# Altium PCB OutputPowerModule.PcbDoc
Units mm, origin at the board's own origin, x right, y up, seen from the top; angles counter-clockwise.
Board outline 53.88 x 57.91 mm, 2 copper layers (Top Layer, Bottom Layer); 62 components, 46 nets, 211 pads, 37 vias.
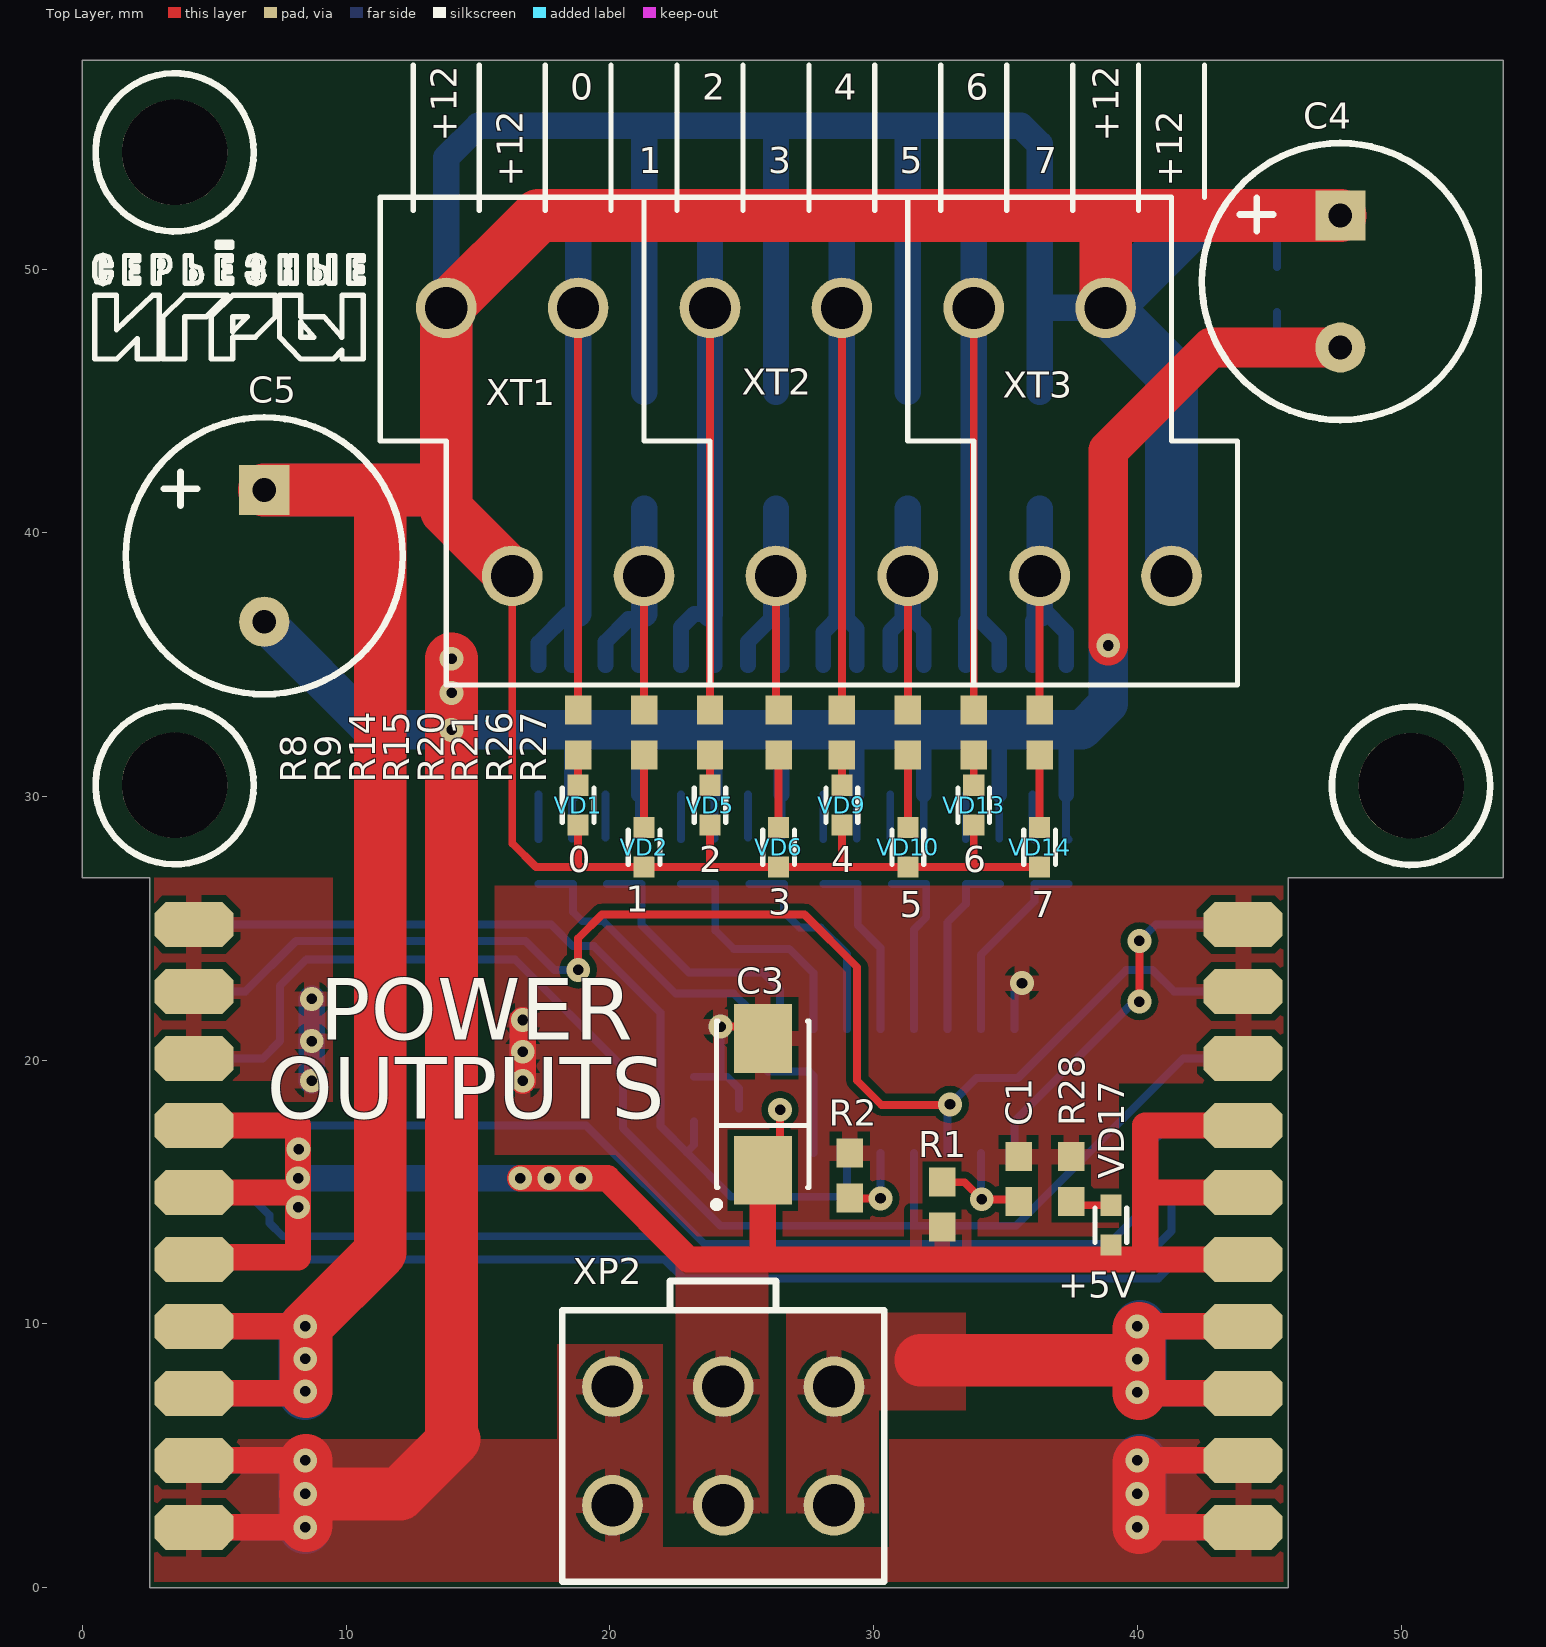
[diagram p0: Top Layer view]
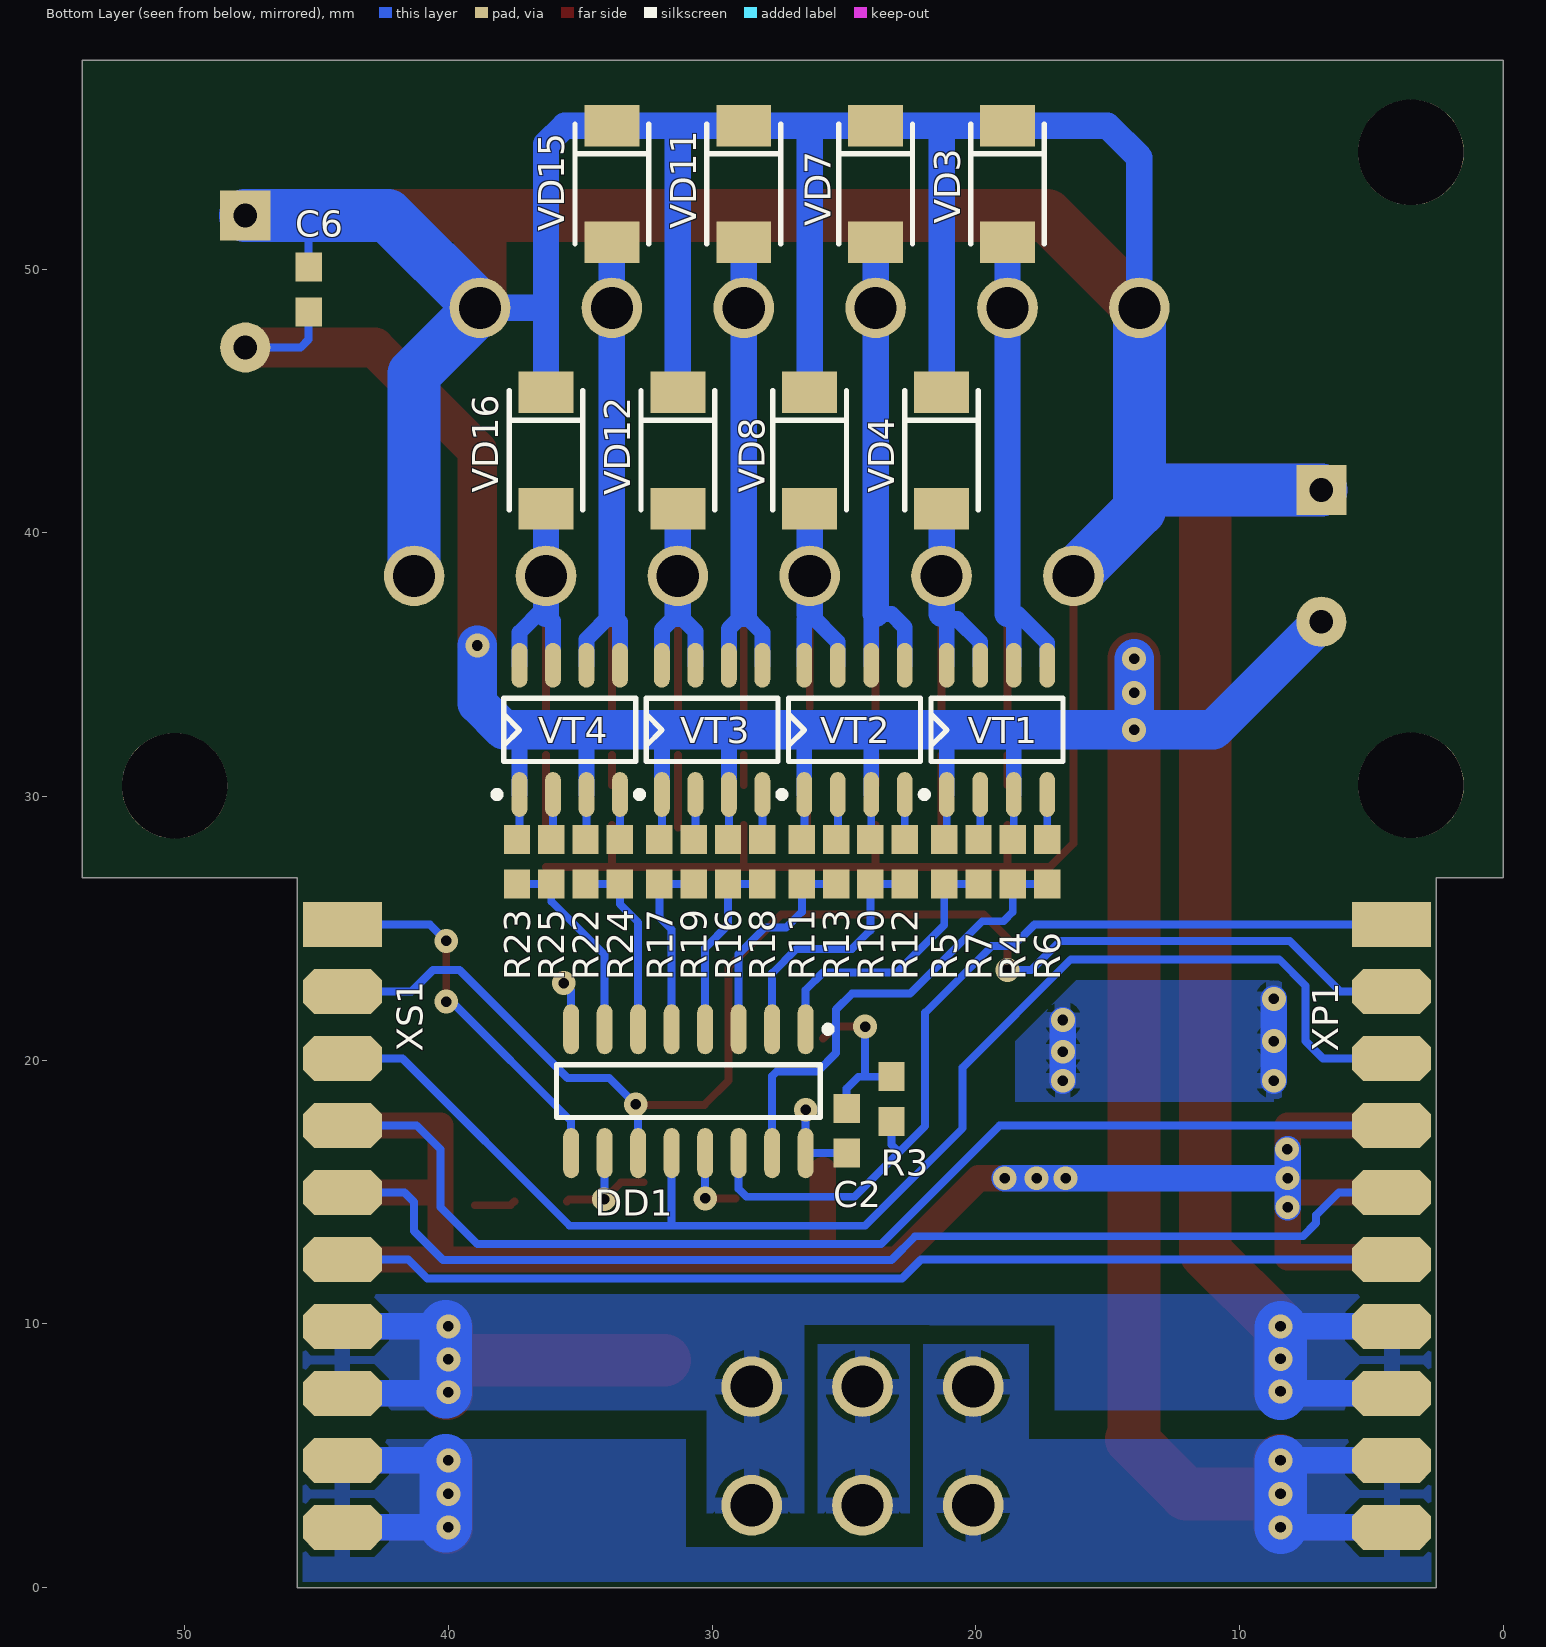
[diagram p1: Bottom Layer view, seen from below]
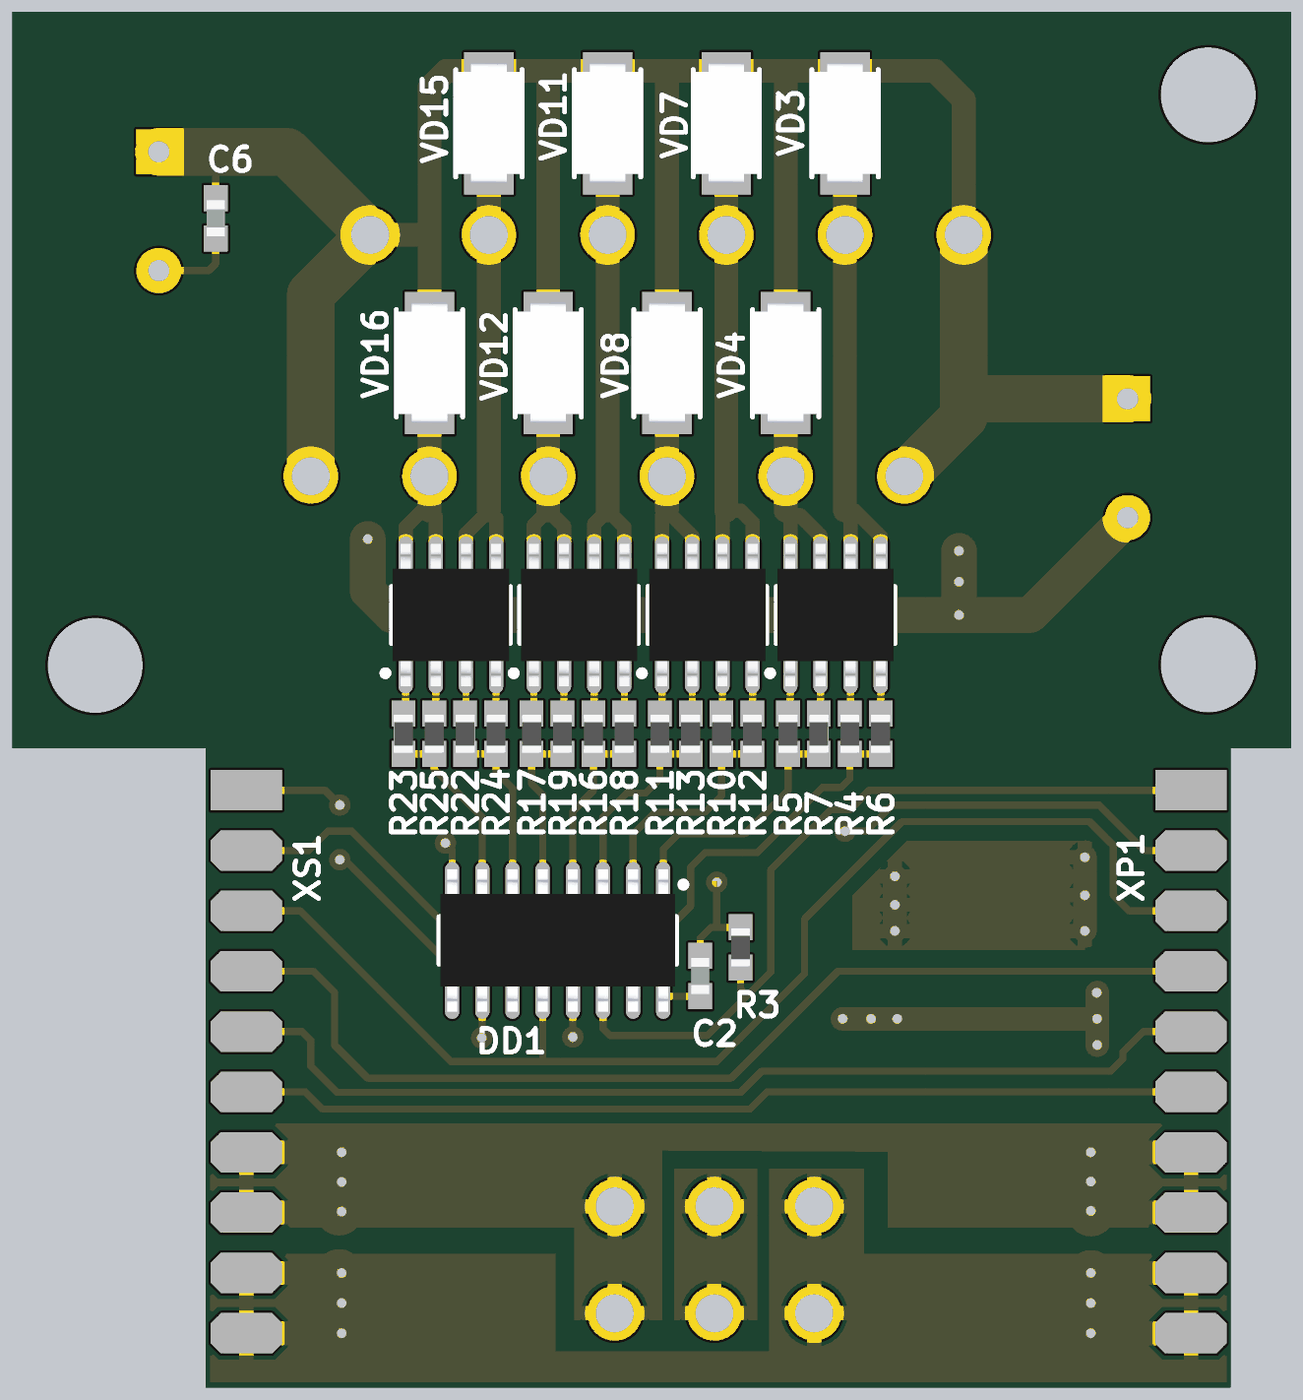
[diagram p2: 3D render of the assembled board from below, using the file's embedded part models]

## Layer stack, top to bottom
Top Layer: signal copper 0.0356
Dielectric: dielectric 0.32, FR-4, Dk 4.8
Bottom Layer: signal copper 0.0356

## Board outline
0,26.925 0,57.913 53.88,57.913 53.88,26.925 45.73,26.925 45.73,0.001 2.55,0.001 2.55,26.925

## Design rules (kind name [scope] priority, off if disabled: settings)
Clearance [All] p1: gap=0.254
HoleSize [All] p1: absolutevalues=TRUE maxlimit=5.54 minlimit=0.025 maxpercent=80.000 minpercent=20.000
PolygonConnect [All] p1: connectstyle=Relief reliefconductorwidth=0.6 reliefentries=4 polygonreliefangle="90 Angle"
RoutingVias [All] p1: holewidth=0.4 width=0.9 viastyle="Through Hole" minholewidth=0.3 minwidth=0.6 maxholewidth=7 maxwidth=7
SilkscreenOverComponentPads [All] p1: minsilkscreentomaskgap=0.254
SolderMaskExpansion [All] p1: expansion=0.102
Width [All] p1: maxlimit=2.54 minlimit=0.254 preferedwidth=0.254
26 further rules are at their usual default settings.

## Components (designator, comment, footprint, x,y, rotation, side; value= is the part's Value field where it differs from the comment)
C1 "0.1uF" C-1608[0603] 35.5,15.5 r270 top
C2 "0.1uF" C-1608[0603] 24.9,17.325 r90 bottom
C3 "47uF" C-CASE 25.8,18.325 r90 top
C4 "1000uF x 25V" D10-5MM 47.7,49.525 r0 top
C5 "1000uF x 25V" D10-5MM 6.9,39.125 r0 top
C6 "0.1uF" C-1608[0603] 45.3,49.225 r270 bottom
DD1 "SN74HC595D" SO-G16 30.9,18.825 r270 bottom
R1 "10K" R-1608[0603] 32.6,14.525 r270 top
R2 "10K" R-1608[0603] 29.1,15.625 r90 top
R3 "10K" R-1608[0603] 23.2,18.525 r90 bottom
R4 "10K" R-1608[0603] 18.6,27.525 r90 bottom
R5 "10K" R-1608[0603] 21.2,27.525 r90 bottom
R6 "510" R-1608[0603] 17.3,27.525 r270 bottom
R7 "510" R-1608[0603] 19.9,27.525 r270 bottom
R8 "2.7K" R-1608[0603] 18.8,32.425 r90 top
R9 "2.7K" R-1608[0603] 21.3,32.425 r90 top
R10 "10K" R-1608[0603] 24,27.525 r90 bottom
R11 "10K" R-1608[0603] 26.6,27.525 r90 bottom
R12 "510" R-1608[0603] 22.7,27.525 r270 bottom
R13 "510" R-1608[0603] 25.3,27.525 r270 bottom
R14 "2.7K" R-1608[0603] 23.8,32.425 r90 top
R15 "2.7K" R-1608[0603] 26.4,32.425 r90 top
R16 "10K" R-1608[0603] 29.4,27.525 r90 bottom
R17 "10K" R-1608[0603] 32,27.525 r90 bottom
R18 "510" R-1608[0603] 28.1,27.525 r270 bottom
R19 "510" R-1608[0603] 30.7,27.525 r270 bottom
R20 "2.7K" R-1608[0603] 28.8,32.425 r90 top
R21 "2.7K" R-1608[0603] 31.3,32.425 r90 top
R22 "10K" R-1608[0603] 34.8,27.525 r90 bottom
R23 "10K" R-1608[0603] 37.4,27.525 r90 bottom
R24 "510" R-1608[0603] 33.5,27.525 r270 bottom
R25 "510" R-1608[0603] 36.1,27.525 r270 bottom
R26 "2.7K" R-1608[0603] 33.8,32.425 r90 top
R27 "2.7K" R-1608[0603] 36.3,32.425 r90 top
R28 "1K" R-1608[0603] 37.5,15.5 r90 top
VD1 "L-C191KGCT" LED-0603 18.8,30.425 r270 top
VD2 "L-C191KGCT" LED-0603 21.3,28.825 r270 top
VD3 "SS14" SMA 18.8,53.225 r270 bottom
VD4 "SS14" SMA 21.3,43.125 r270 bottom
VD5 "L-C191KGCT" LED-0603 23.8,30.425 r270 top
VD6 "L-C191KGCT" LED-0603 26.4,28.825 r270 top
VD7 "SS14" SMA 23.8,53.225 r270 bottom
VD8 "SS14" SMA 26.3,43.125 r270 bottom
VD9 "L-C191KGCT" LED-0603 28.8,30.425 r270 top
VD10 "L-C191KGCT" LED-0603 31.3,28.825 r270 top
VD11 "SS14" SMA 28.8,53.225 r270 bottom
VD12 "SS14" SMA 31.3,43.125 r270 bottom
VD13 "L-C191KGCT" LED-0603 33.8,30.425 r270 top
VD14 "L-C191KGCT" LED-0603 36.3,28.825 r270 top
VD15 "SS14" SMA 33.8,53.225 r270 bottom
VD16 "SS14" SMA 36.3,43.125 r270 bottom
VD17 "L-C191KGCT" LED-0603 39,14.5 r270 top
VT1 "IRF8313" SO8 19.2,32.525 r90 bottom
VT2 "IRF8313" SO8 24.6,32.525 r90 bottom
VT3 "IRF8313" SO8 30,32.525 r90 bottom
VT4 "IRF8313" SO8 35.4,32.525 r90 bottom
XP1 "PLD-20" "PLD-20 ROT" 4.234,25.147 r180 bottom
XP2 "MF-6M" MF-6M 28.5,3.125 r180 top
XS1 "PBD-20" "PBD-20 ROT" 44.012,25.147 r180 bottom
XT1 "DG127A-5.0-2" DG127A-5.0-2 11.3,52.725 r180 top
XT2 "DG127A-5.0-2" DG127A-5.0-2 21.3,52.725 r180 top
XT3 "DG127A-5.0-2" DG127A-5.0-2 31.3,52.725 r180 top

## Footprints (in the part's own frame and the unit in brackets; to place one, negate y for a bottom-side part, rotate by r counter-clockwise, add the part's x,y. Pads: shape width x height; smd on the part's side, far side on the other; paste and mask are expansions set on the pad)
C-1608[0603] [mm]
  rect 1.1x1 smd: 1(-0.85,0) 2(0.85,0)
  body extent -0.76,-0.38 0.76,0.38, height 0.5
C-CASE [mm]
  rect 2.6x2.2 smd: 1(-2.5,0) 2(2.5,0)
  silkscreen extent -3.92,-1.75 3.15,1.87, body extent -3,-1.6 3,1.6, height 2.51
D10-5MM [mm]
  rect 1.9x1.9 hole 0.9: 1(0,2.5)
  round 1.9 hole 0.9: 2(0,-2.5)
  silkscreen extent -5.25,-5.25 5.25,5.25, body extent -5.26,-5.26 5.26,5.26, height 20
DG127A-5.0-2 [mm] "Клеммник винтовой двухрядный 5.0мм, 2х2 контакта"
  round 2.3 hole 1.6: 1(-2.5,4.2) 2(-5,14.36) 3(-7.5,4.2) 4(-10,14.36)
  silkscreen extent -12.5,0 0,18.5, body extent -12.5,0 0,18.49, height 19.2
LED-0603 [mm]
  rect 0.8x0.8 smd: 1(0,0) 2(1.5,0)
  silkscreen extent 0.1,-0.6 1.4,0.6
MF-6M [mm] "Molex Male Connector 6 pin"
  round 2.3 hole 1.6: 1(0,0) 2(4.2,0) 3(8.4,0) 4(0,-4.5) 5(4.2,-4.5) 6(8.4,-4.5)
  silkscreen extent -1.91,-8.5 10.31,2.9, body extent -1.91,-7.4 10.3,2.9, height 12.9
"PBD-20 ROT" [mm] "2.54mm 2row 20pin FEMALE connector"
  rect 3x1.7 smd: 1(0,0)
  oct 3x1.7 smd far side: 2(0,0) 4(0,-2.54) 6(0,-5.08) 8(0,-7.62) 10(0,-10.16) 12(0,-12.7) 14(0,-15.24) 16(0,-17.78) 18(0,-20.32) 20(0,-22.86)
  oct 3x1.7 smd: 3(0,-2.54) 5(0,-5.08) 7(0,-7.62) 9(0,-10.16) 11(0,-12.7) 13(0,-15.24) 15(0,-17.78) 17(0,-20.32) 19(0,-22.86)
  body extent -9.78,-24.18 -1.68,1.32, height 2.7
"PLD-20 ROT" [mm] "2.54mm 2 row 20 pin MALE connector"
  rect 3x1.7 smd: 1(0,0)
  oct 3x1.7 smd far side: 2(0,0) 4(0,-2.54) 6(0,-5.08) 8(0,-7.62) 10(0,-10.16) 12(0,-12.7) 14(0,-15.24) 16(0,-17.78) 18(0,-20.32) 20(0,-22.86)
  oct 3x1.7 smd: 3(0,-2.54) 5(0,-5.08) 7(0,-7.62) 9(0,-10.16) 11(0,-12.7) 13(0,-15.24) 15(0,-17.78) 17(0,-20.32) 19(0,-22.86)
  body extent 1.73,-24.08 9.45,1.32, height 2.7
R-1608[0603] [mm]
  rect 1.1x1 smd: 1(-0.85,0) 2(0.85,0)
  body extent -0.8,-0.4 0.8,0.4, height 0.37
SMA [mil] "http://www.vishay.com/docs/95018/sma.pdf"
  rect 62x82 smd mask+4: 1(-87,0) 2(87,0)
  silkscreen extent -89,-55 89,55, body extent -100,-53 98,53, height 87
SO8 [mm] "SOIC, 8-Leads, Body 4.9x3.9mm, Pitch 1.27mm, IPC High Density"
  oval 1.7x0.6 smd: 1(-2.45,1.905) 2(-2.45,0.635) 3(-2.45,-0.635) 4(-2.45,-1.905) 5(2.45,-1.905) 6(2.45,-0.635) 7(2.45,0.635) 8(2.45,1.905)
  silkscreen extent -2.57,-2.5 1.2,2.88, body extent -3,-2.45 3,2.45, height 1.53
SO-G16 [mm] "SOIC, 16-Leads, Body 9.9x3.9mm, Pitch 1.27mm, IPC High Density"
  oval 1.9x0.6 smd: 1(-2.35,4.445) 2(-2.35,3.175) 3(-2.35,1.905) 4(-2.35,0.635) 5(-2.35,-0.635) 6(-2.35,-1.905) 7(-2.35,-3.175) 8(-2.35,-4.445) 9(2.35,-4.445) 10(2.35,-3.175) 11(2.35,-1.905) 12(2.35,-0.635) 13(2.35,0.635) 14(2.35,1.905) 15(2.35,3.175) 16(2.35,4.445)
  silkscreen extent -2.47,-5 1,5.42, body extent -3,-4.95 3,4.95, height 1.53

## Part data
C1 C2 C6: library part C-0603, "C-0603"
C3: library part C-CCASE, "C-CCASE"
C4 C5: library part K50-35(D10MM), "K50-35(D10MM)"
R1 R2 R3 R4 R5 R6 R7 R8 R9 R10 R11 R12 R13 R14 R15 R16 R17 R18 R19 R20 R21 R22 R23 R24 R25 R26 R27 R28: library part R-0603, "R-0603"
VD1 VD2 VD5 VD6 VD9 VD10 VD13 VD14 VD17: "0603 Green Led"
VD3 VD4 VD7 VD8 VD11 VD12 VD15 VD16: library part SS16
VT1 VT2 VT3 VT4: "HEXFET Power MOSFET N channel"
XP1: "20 pin, 2 row, MALE connector"
XP2: "Molex Male connector"
XS1: "2.54mm, 20 pin FEMALE connector"
XT1 XT2 XT3: "Клеммник винтовой двухрядный шаг 5.0 мм 2х2 контактов"

## Free pads (board coordinates)
  round 4 hole 4 unplated: 0(3.502,30.427) 0(3.502,54.423) 0(50.382,30.403)

## Via types
v1: diameter 0.9, hole 0.4, Top Layer to Bottom Layer, tented both sides, 37 vias

## Nets (pads, with @x,y where several pads share a name; then routed paths per layer and width w, separated by ;. In a path a pad name is that pad's centre, name@x,y a point inside that pad or via, vN(x,y) a via of type N, cw(c..) or ccw(c..) an arc to the next point about the centre after c; other vN are vias at no path point)
+5V: C2.1 C3.1 DD1.16 R1.2 VD17.2 XP1.8 XP1.10 XP1.12 XP2.2 XP2.5 XS1.8 XS1.10 XS1.12 | length 72.9
  Top Layer w0.3: C3.1@26.455,16.98 v1(26.455,18.125)
  Top Layer w1: XP1.12@5.334,12.527 8.18,12.527 v1(8.18,14.425) 8.18,14.987 ; XP1.10@5.334,14.987 8.18,14.987 ; XP1.8@5.334,17.527 8.18,17.527 v1(8.18,15.525) 8.18,14.987 ; v1(16.6,15.525) v1(17.7,15.525) v1(18.9,15.525) 19.9,15.525 22.978,12.447 40.3,12.447 ; 25.8,12.547 C3.1 ; XS1.12@43.212,12.447 40.3,12.447 ; XS1.10@43.212,14.987 40.3,14.987 ; XS1.8@43.212,17.527 40.3,17.527 40.3,14.987 ; 40.3,12.447 40.3,14.987
  Bottom Layer w0.3: C2.1 DD1.16 v1(26.455,18.125)
  Bottom Layer w1: v1(8.18,14.425) v1(8.18,15.525) ; v1@8.18,16.625 v1(8.18,15.525) ; v1(18.9,15.525) v1(17.7,15.525) v1(16.6,15.525) v1(8.18,15.525)
  other v1: 8.2,16.625
+12V_HC: C4.1 C5.1 C6.1 VD1.2 VD2.2 VD3.1 VD4.1 VD5.2 VD6.2 VD7.1 VD8.1 VD9.2 VD10.2 VD11.1 VD12.1 VD13.2 VD14.2 VD15.1 VD16.1 XP1.13 XP1.14 XP1.15 XP1.16 XP2.1 XP2.4 XS1.13 XS1.14 XS1.15 XS1.16 XT1.1 XT1.2 XT3.3 XT3.4 | length 280.8
  Top Layer w0.3: XT1.2 16.3,28.225 17.2,27.325 VD2.2 VD6.2 VD10.2 VD14.2 ; 18.8,27.325 VD1.2 ; 23.8,27.425 VD5.2 ; 28.8,27.325 VD9.2 ; 33.8,27.325 VD13.2
  Top Layer w1: XP1.16@5.334,7.367 v1@8.406,7.367 ; XP1.14@5.334,9.907 v1@8.482,9.907 ; v1@40.064,7.367 XS1.16@43.212,7.367 ; v1@40.14,9.907 XS1.14@43.212,9.907
  Top Layer w2: C5.1 13.04,41.625 ; v1@8.482,7.443 8.482,9.907 11.3,12.725 11.3,41.625 ; XT1.2 13.8,40.865 XT1.1 17.3,52.025 C4.1 ; 31.8,8.625 v1@40.064,8.625 ; XT3.3 38.8,52.025 ; v1@40.064,7.367 v1@40.064,8.625 ; v1@40.064,9.831 v1@40.064,8.625
  Bottom Layer w0.3: C6.1 45.3,52.025
  Bottom Layer w1: XP1.15@5.334,7.367 v1@8.442,7.367 ; XP1.13@5.334,9.907 v1@8.482,9.907 ; XT1.1 13.8,54.225 15.01,55.435 VD3.1 VD7.1 VD11.1 VD15.1 35.59,55.435 36.3,54.725 36.3,48.525 ; VD4.1 21.3,55.435 ; VD8.1 26.3,55.235 ; VD12.1 31.3,55.425 ; VD16.1 36.3,48.525 ; XT3.3 36.3,48.525 ; v1@40.064,7.367 XS1.15@43.212,7.367 ; v1@40.104,9.907 XS1.13@43.212,9.907
  Bottom Layer w2: C5.1 13.04,41.625 ; v1@8.442,7.367 v1@8.442,9.867 ; XT1.1 13.8,40.865 XT1.2 ; v1@40.104,7.407 v1@40.104,9.907 ; XT3.4 41.3,46.025 XT3.3 42.3,52.025 45.3,52.025 C4.1
  other v1: 40,7.407 8.45,7.443 8.45,8.675 40,8.657 8.45,9.907 40,9.907
DATA_FROM_MASTER: DD1.14 R3.1 XP1.1 | length 33.2
  Bottom Layer w0.3: XP1.1@5.334,25.147 17.778,25.147 17.8,25.125 18.6,24.325 19.4,24.325 21.922,21.803 21.922,17.503 22.916,16.509 ; R3.1 23.2,16.794 22.916,16.509 ; DD1.14 28.995,15.12 28.7,14.825 24.6,14.825 22.916,16.509
DATA_TO_SLAVE: DD1.9 XS1.1 | length 16.3
  Top Layer w0.3: v1(40.08,22.225) v1(40.08,24.525)
  Bottom Layer w0.3: DD1.9 35.345,17.64 35.345,17.69 39.88,22.225 v1(40.08,22.225) ; v1(40.08,24.525) 40.702,25.147 XS1.1 ; 41.222,25.147 XS1.1@43.212,25.147
DO_0: DD1.15 R4.1 R6.2 | length 17.9
  Bottom Layer w0.3: R6.2 R4.1 18.6,25.625 18.956,25.269 19.756,25.269 22.5,22.525 24.7,22.525 25.3,21.925 25.3,20.275 26,19.575 27.55,19.575 27.725,19.4 DD1.15
DO_1: DD1.1 R5.1 R7.2 | length 10.6
  Bottom Layer w0.3: R7.2 R5.1 21.2,25.125 23,23.325 25.8,23.325 26.455,22.67 DD1.1
DO_2: DD1.2 R10.1 R12.2 | length 9.6
  Bottom Layer w0.3: R12.2 R10.1 24,24.925 24.7,24.225 26.8,24.225 27.725,23.3 DD1.2
DO_3: DD1.3 R11.1 R13.2 | length 8.3
  Bottom Layer w0.3: R13.2 R11.1 26.6,25.625 27.2,25.025 28,25.025 28.995,24.03 DD1.3
DO_4: DD1.4 R16.1 R18.2 | length 7.2
  Bottom Layer w0.3: R18.2 R16.1 29.4,25.125 30.265,24.26 DD1.4
DO_5: DD1.5 R17.1 R19.2 | length 7
  Bottom Layer w0.3: R19.2 R17.1 32,25.425 31.535,24.96 DD1.5
DO_6: DD1.6 R22.1 R24.2 | length 7.1
  Bottom Layer w0.3: DD1.6 32.805,25.23 33.5,25.925 R24.2 R22.1
DO_7: DD1.7 R23.1 R25.2 | length 7.6
  Bottom Layer w0.3: DD1.7 34.075,24 36.1,26.025 R25.2 R23.1
GND: C1.1 C2.2 C3.2 DD1.8 R2.2 R3.2 R28.2 XP1.2 XP1.4 XP1.6 XS1.2 XS1.4 XS1.6 | length 16.9
  Top Layer w0.3: v1(24.2,21.275) 25.35,21.275 C3.2
  Top Layer w1: v1(16.7,19.225) v1(16.7,21.525)
  Bottom Layer w0.3: R3.2 24.45,19.375 24.9,18.925 C2.2 ; 24.2,19.375 v1(24.2,21.275) ; DD1.8 35.345,22.64 v1(35.63,22.925)
  Bottom Layer w1: v1(8.7,19.225) 8.7,19.925 ; v1@8.7,20.925 8.7,19.925 ; v1(8.7,22.325) 8.7,19.925 ; v1(16.7,19.225) v1(16.7,21.525)
  other v1: 16.7,20.325 8.7,20.725
GND_HC: C4.2 C5.2 C6.2 R4.2 R5.2 R10.2 R11.2 R16.2 R17.2 R22.2 R23.2 VT1.1 VT1.3 VT2.1 VT2.3 VT3.1 VT3.3 VT4.1 VT4.3 XP1.17 XP1.18 XP1.19 XP1.20 XP2.3 XP2.6 XS1.17 XS1.18 XS1.19 XS1.20 | length 163.3
  Top Layer w1: XP1.20@5.334,2.287 v1@8.406,2.287 ; XP1.18@5.334,4.827 v1(8.45,4.827) v1@8.482,4.827 ; v1@40.064,2.287 XS1.20@43.212,2.287 ; v1@40.14,4.827 XS1.18@43.212,4.827
  Top Layer w1.5: v1(38.9,35.725) 38.9,43.125 42.8,47.025 C4.2
  Top Layer w2: v1(8.45,3.557) v1@8.482,3.557 ; v1@8.482,2.363 v1@8.482,3.557 ; v1@8.482,4.827 v1@8.482,3.557 ; v1(14,35.225) 14,5.725 14.1,5.625 12.032,3.557 v1@8.482,3.557 ; v1@40.064,2.287 v1@40.064,4.751
  Bottom Layer w0.3: R4.2@18.565,28.41 VT1.3 ; R5.2@21.105,28.47 VT1.1 ; R10.2@23.965,28.41 VT2.3 ; R11.2@26.505,28.47 VT2.1 ; R16.2@29.365,28.41 VT3.3 ; R17.2@31.905,28.47 VT3.1 ; R22.2@34.765,28.41 VT4.3 ; VT4.1 37.305,28.47 R23.2 ; C6.2 45.3,47.325 45.6,47.025 C4.2
  Bottom Layer w0.6: VT1.3 18.565,32.49 ; VT1.1 21.105,32.52 ; VT2.3 23.965,32.46 ; VT2.1 26.505,32.52 ; VT3.3 29.365,32.46 ; VT3.1 31.905,32.43 ; VT4.3 34.765,32.46 ; VT4.1 37.305,31.93
  Bottom Layer w1: XP1.19@5.334,2.287 v1@8.442,2.287 ; XP1.17@5.334,4.827 v1(8.45,4.827) v1@8.482,4.827 ; v1@40.064,2.287 XS1.19@43.212,2.287 ; v1@40.104,4.827 XS1.17@43.212,4.827
  Bottom Layer w1.5: C5.2 11,32.525 v1(14,32.525) ; v1(14,35.225) v1(14,32.525) ; v1(38.9,35.725) 38.9,33.525 37.9,32.525 v1(14,32.525)
  Bottom Layer w2: v1@8.442,2.287 v1@8.442,4.787 ; v1@40.104,2.327 v1@40.104,4.827
  other v1: 8.45,2.287 40,2.287 40,3.557 40,4.827 14,33.925
NetC1_2: C1.2 DD1.10 R1.1 | length 4.9
  Top Layer w0.3: R1.1 33.45,15.375 v1(34.1,14.725) 35.425,14.725 C1.2
  Bottom Layer w0.3: v1@34.075,14.75 DD1.10
NetDD1_13: DD1.13 R2.1 | length 2.9
  Top Layer w0.3: R2.1@29.115,14.76 v1(30.265,14.76)
  Bottom Layer w0.3: v1(30.265,14.76) DD1.13
NetR6_1: R6.1 VT1.4 | length 1.7
  Bottom Layer w0.3: R6.1@17.295,28.38 VT1.4
NetR7_1: R7.1 VT1.2 | length 1.6
  Bottom Layer w0.3: R7.1@19.835,28.44 VT1.2
NetR8_1: R8.1 VD1.1 | length 1.1
  Top Layer w0.3: VD1.1 R8.1
NetR9_1: R9.1 VD2.1 | length 2.7
  Top Layer w0.3: VD2.1 R9.1
NetR12_1: R12.1 VT2.4 | length 1.7
  Bottom Layer w0.3: R12.1@22.695,28.38 VT2.4
NetR13_1: R13.1 VT2.2 | length 1.6
  Bottom Layer w0.3: R13.1@25.235,28.44 VT2.2
NetR14_1: R14.1 VD5.1 | length 1.1
  Top Layer w0.3: VD5.1 R14.1
NetR15_1: R15.1 VD6.1 | length 2.7
  Top Layer w0.3: VD6.1 R15.1
NetR18_1: R18.1 VT3.4 | length 1.7
  Bottom Layer w0.3: R18.1@28.095,28.38 VT3.4
NetR19_1: R19.1 VT3.2 | length 1.6
  Bottom Layer w0.3: R19.1@30.635,28.44 VT3.2
NetR20_1: R20.1 VD9.1 | length 1.1
  Top Layer w0.3: VD9.1 R20.1
NetR21_1: R21.1 VD10.1 | length 2.7
  Top Layer w0.3: VD10.1 R21.1
NetR24_1: R24.1 VT4.4 | length 1.7
  Bottom Layer w0.3: R24.1@33.495,28.38 VT4.4
NetR25_1: R25.1 VT4.2 | length 1.7
  Bottom Layer w0.3: VT4.2 36.035,28.44 R25.1
NetR26_1: R26.1 VD13.1 | length 1.1
  Top Layer w0.3: VD13.1 R26.1
NetR27_1: R27.1 VD14.1 | length 2.7
  Top Layer w0.3: VD14.1 R27.1
NetR28_1: R28.1 VD17.1 | length 1.6
  Top Layer w0.3: R28.1 37.65,14.5 VD17.1
NetXP1_7: XP1.7 XS1.7 | length 42.9
  Bottom Layer w0.3: XP1.7@5.334,17.527 5.336,17.529 8.554,17.529 8.556,17.527 19.098,17.527 23.6,13.025 38.9,13.025 40.3,14.425 40.3,16.625 41.202,17.527 XS1.7@43.212,17.527
NetXP1_9: XP1.9 XS1.9 | length 40.8
  Bottom Layer w0.3: XP1.9@5.334,14.987 6.238,14.987 7.1,14.125 7.1,13.825 7.6,13.325 22.3,13.325 23.2,12.425 40.2,12.425 41.3,13.525 41.3,14.625 41.662,14.987 XS1.9@43.212,14.987
NetXP1_11: XP1.11 XS1.11 | length 38.5
  Bottom Layer w0.3: XP1.11@5.334,12.447 22.078,12.447 22.8,11.725 40.8,11.725 41.522,12.447 XS1.11@43.212,12.447
POW_0: R8.2 VD3.2 VT1.5 VT1.6 XT1.3 | length 33.9
  Top Layer w0.3: R8.2 XT1.3
  Bottom Layer w0.6: VT1.5 17.295,35.82 18.4,36.925 18.8,36.925 ; VT1.6 18.565,36.69
  Bottom Layer w1: 18.8,36.925 VD3.2
POW_1: R9.2 VD4.2 VT1.7 VT1.8 XT1.4 | length 13.3
  Top Layer w0.3: R9.2 XT1.4
  Bottom Layer w0.6: VT1.7 19.835,35.86 20.7,36.725 21.3,36.725 ; VT1.8 21.105,36.53
  Bottom Layer w1: 21.3,36.925 VD4.2
POW_2: R14.2 VD7.2 VT2.5 VT2.6 XT2.1 | length 33.9
  Top Layer w0.3: R14.2 XT2.1
  Bottom Layer w0.6: VT2.5 22.695,36.42 23.2,36.925 23.8,36.925 ; VT2.6 23.965,36.76
  Bottom Layer w1: 23.8,36.925 VD7.2
POW_3: R15.2 VD8.2 VT2.7 VT2.8 XT2.2 | length 13.4
  Top Layer w0.3: R15.2@26.3,33.375 XT2.2
  Bottom Layer w0.6: VT2.7 25.235,35.86 26.3,36.925 26.505,36.72 VT2.8
  Bottom Layer w1: 26.3,36.925 VD8.2
POW_4: R20.2 VD11.2 VT3.5 VT3.6 XT2.3 | length 33.8
  Top Layer w0.3: R20.2 XT2.3
  Bottom Layer w0.6: VT3.5 28.095,36.22 28.8,36.925 29.365,36.36 VT3.6
  Bottom Layer w1: 28.8,36.925 VD11.2
POW_5: R21.2 VD12.2 VT3.7 VT3.8 XT2.4 | length 13.5
  Top Layer w0.3: R21.2 XT2.4
  Bottom Layer w0.6: VT3.7 30.635,36.26 31.3,36.925 31.905,36.32 VT3.8
  Bottom Layer w1: 31.3,36.925 VD12.2
POW_6: R26.2 VD15.2 VT4.5 VT4.6 XT3.1 | length 33.8
  Top Layer w0.3: R26.2 XT3.1
  Bottom Layer w0.6: VT4.5 33.495,36.62 33.8,36.925 34.765,35.96 VT4.6
  Bottom Layer w1: 33.8,36.925 XT3.1 VD15.2
POW_7: R27.2 VD16.2 VT4.7 VT4.8 XT3.2 | length 13.8
  Top Layer w0.3: R27.2 XT3.2
  Bottom Layer w0.6: VT4.7 36.035,36.66 36.45,37.075 37.305,36.22 VT4.8
  Bottom Layer w1: 36.3,36.925 VD16.2
SHCP: DD1.11 XP1.3 XS1.3 | length 50.3
  Top Layer w0.3: v1(18.8,23.425) 18.8,24.625 19.7,25.525 27.38,25.525 29.38,23.525 29.38,19.225 30.296,18.309 v1@32.684,18.309
  Bottom Layer w0.3: XP1.3@5.334,22.607 6.182,22.607 8.1,24.525 16.8,24.525 17.9,23.425 v1(18.8,23.425) ; DD1.11 v1@32.805,18.325 ; v1(32.9,18.325) 33.9,19.325 35.48,19.325 39.58,23.425 40.58,23.425 41.398,22.607 XS1.3@43.212,22.607
STCP: DD1.12 XP1.5 XS1.5 | length 52.4
  Bottom Layer w0.3: XP1.5@5.334,20.067 6.842,20.067 7.5,20.725 7.5,22.825 8.5,23.825 16.4,23.825 20.5,19.725 20.5,17.425 24.2,13.725 31.535,13.725 ; DD1.12 31.535,13.725 ; XS1.5 41.742,20.067 35.4,13.725 31.535,13.725

## Polygon pours and split planes (outlines as drawn)
+5V on Bottom Layer "Top Layer-No Net" (solid, pour order 1000): 22.5,9.225 22.5,2.825 26,2.825 26,9.225
GND on Bottom Layer "Top Layer-No Net" (solid, pour order 1003): 8.7,22.325 8.7,23.025 16.2,23.025 18.5,20.725 18.5,18.425 8.7,18.425
GND_HC on Bottom Layer "Top Layer-No Net" (solid, pour order 1002): 31,5.625 31,1.525 22,1.525 22,9.225 18,9.225 18,5.625 2.73,5.625 2.73,0.225 45.53,0.225 45.53,5.625
+12V_HC on Bottom Layer "Top Layer-No Net" (solid, pour order 1001): 2.73,11.125 2.73,6.725 17,6.725 17,9.925 26.5,9.975 26.5,2.825 30.2,2.825 30.2,6.734 45.53,6.725 45.53,11.125
GND on Top Layer "Top Layer-No Net" (solid, remove dead copper, pour order 1009): 45.53,19.125 39.3,19.125 39.3,13.325 23.3,13.325 20.2,16.425 15.63,16.425 15.63,26.625 45.53,26.625
+5V on Top Layer "Top Layer-No Net" (solid, pour order 1004): 22.5,12.925 22.5,2.825 26,2.825 26,12.925
+12V_HC on Top Layer "Top Layer-No Net" (solid, pour order 1006): 26.7,10.425 26.7,2.825 30.2,2.825 30.2,6.725 33.5,6.725 33.5,10.425
+5V on Top Layer "Top Layer-No Net" (solid, pour order 1007): 31.4,14.325 33.7,14.325 33.7,12.447 31.4,12.447
GND_HC on Top Layer "Top Layer-No Net" (solid, pour order 1005): 30.6,5.625 30.6,1.525 22,1.525 22,9.225 18,9.225 18,5.625 2.73,5.625 2.73,0.225 45.53,0.225 45.53,5.625
GND on Top Layer "Top Layer-No Net" (solid, pour order 1008): 2.73,26.925 2.73,19.225 7.5,19.225 7.5,18.425 9.5,18.425 9.5,26.925

## Silkscreen, mask and mechanical layers (free items; w line width, h text height)
Top Overlay:
  drawing of 235 lines, arcs and shapes, not listed
  text "0" at 18.5,56.425 h1
  text "2" at 23.5,56.425 h1
  text "4" at 28.5,56.425 h1
  text "6" at 33.5,56.425 h1
  text "+12" at 14.2,54.825 h1 r90
  text "+12" at 39.3,54.825 h1 r90
  text "1" at 21.1,53.625 h1
  text "3" at 26,53.625 h1
  text "5" at 31,53.625 h1
  text "7" at 36.1,53.625 h1
  text "+12" at 16.7,53.125 h1 r90
  text "+12" at 41.7,53.125 h1 r90
  text "0" at 18.4,27.125 h1
  text "2" at 23.4,27.125 h1
  text "4" at 28.4,27.125 h1
  text "6" at 33.4,27.125 h1
  text "1" at 20.6,25.625 h1
  text "3" at 26,25.525 h1
  text "5" at 31,25.425 h1
  text "7" at 36,25.425 h1
  text "POWER" at 9,20 h4
  text "OUTPUTS" at 7,17 h4
  text "+5V" at 37,11 h1
Mechanical 2:
  lines w0.2: 2.55,0.001 45.73,0.001 45.73,26.925 53.88,26.925 53.88,57.913 0,57.913 0,26.925 2.55,26.925 2.55,0.025